# Altium PCB PCB2.PcbDoc
Units mil, origin at the board's own origin, x right, y up, seen from the top; angles counter-clockwise.
Board outline 5545 x 5530 mil, 2 copper layers (Top Layer, Bottom Layer); 7 components, 0 nets, 14 pads, 0 vias.
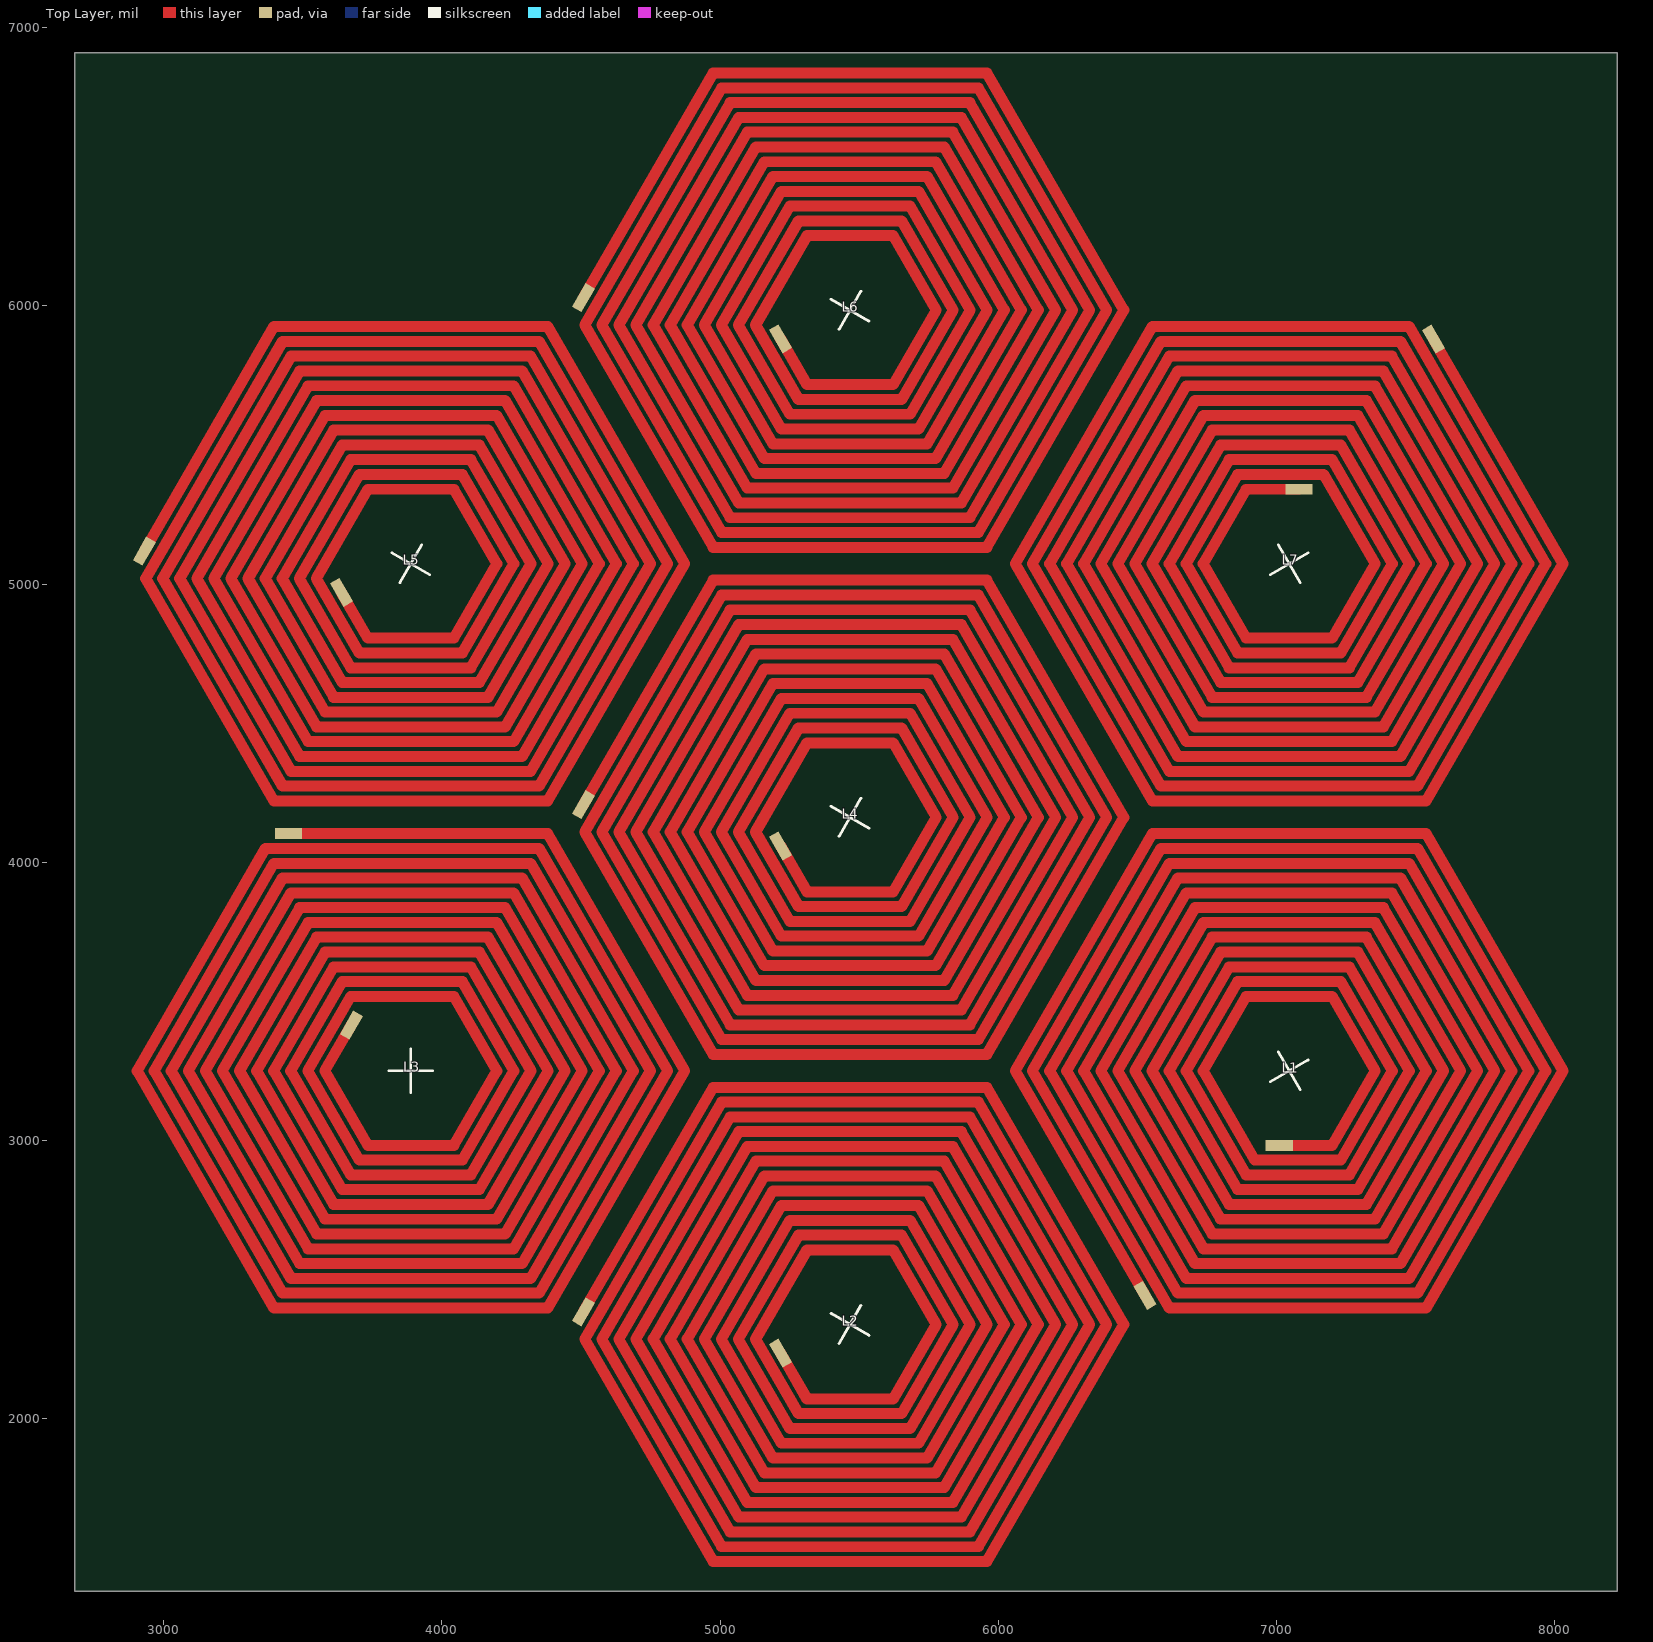
[diagram p0: Top Layer view]
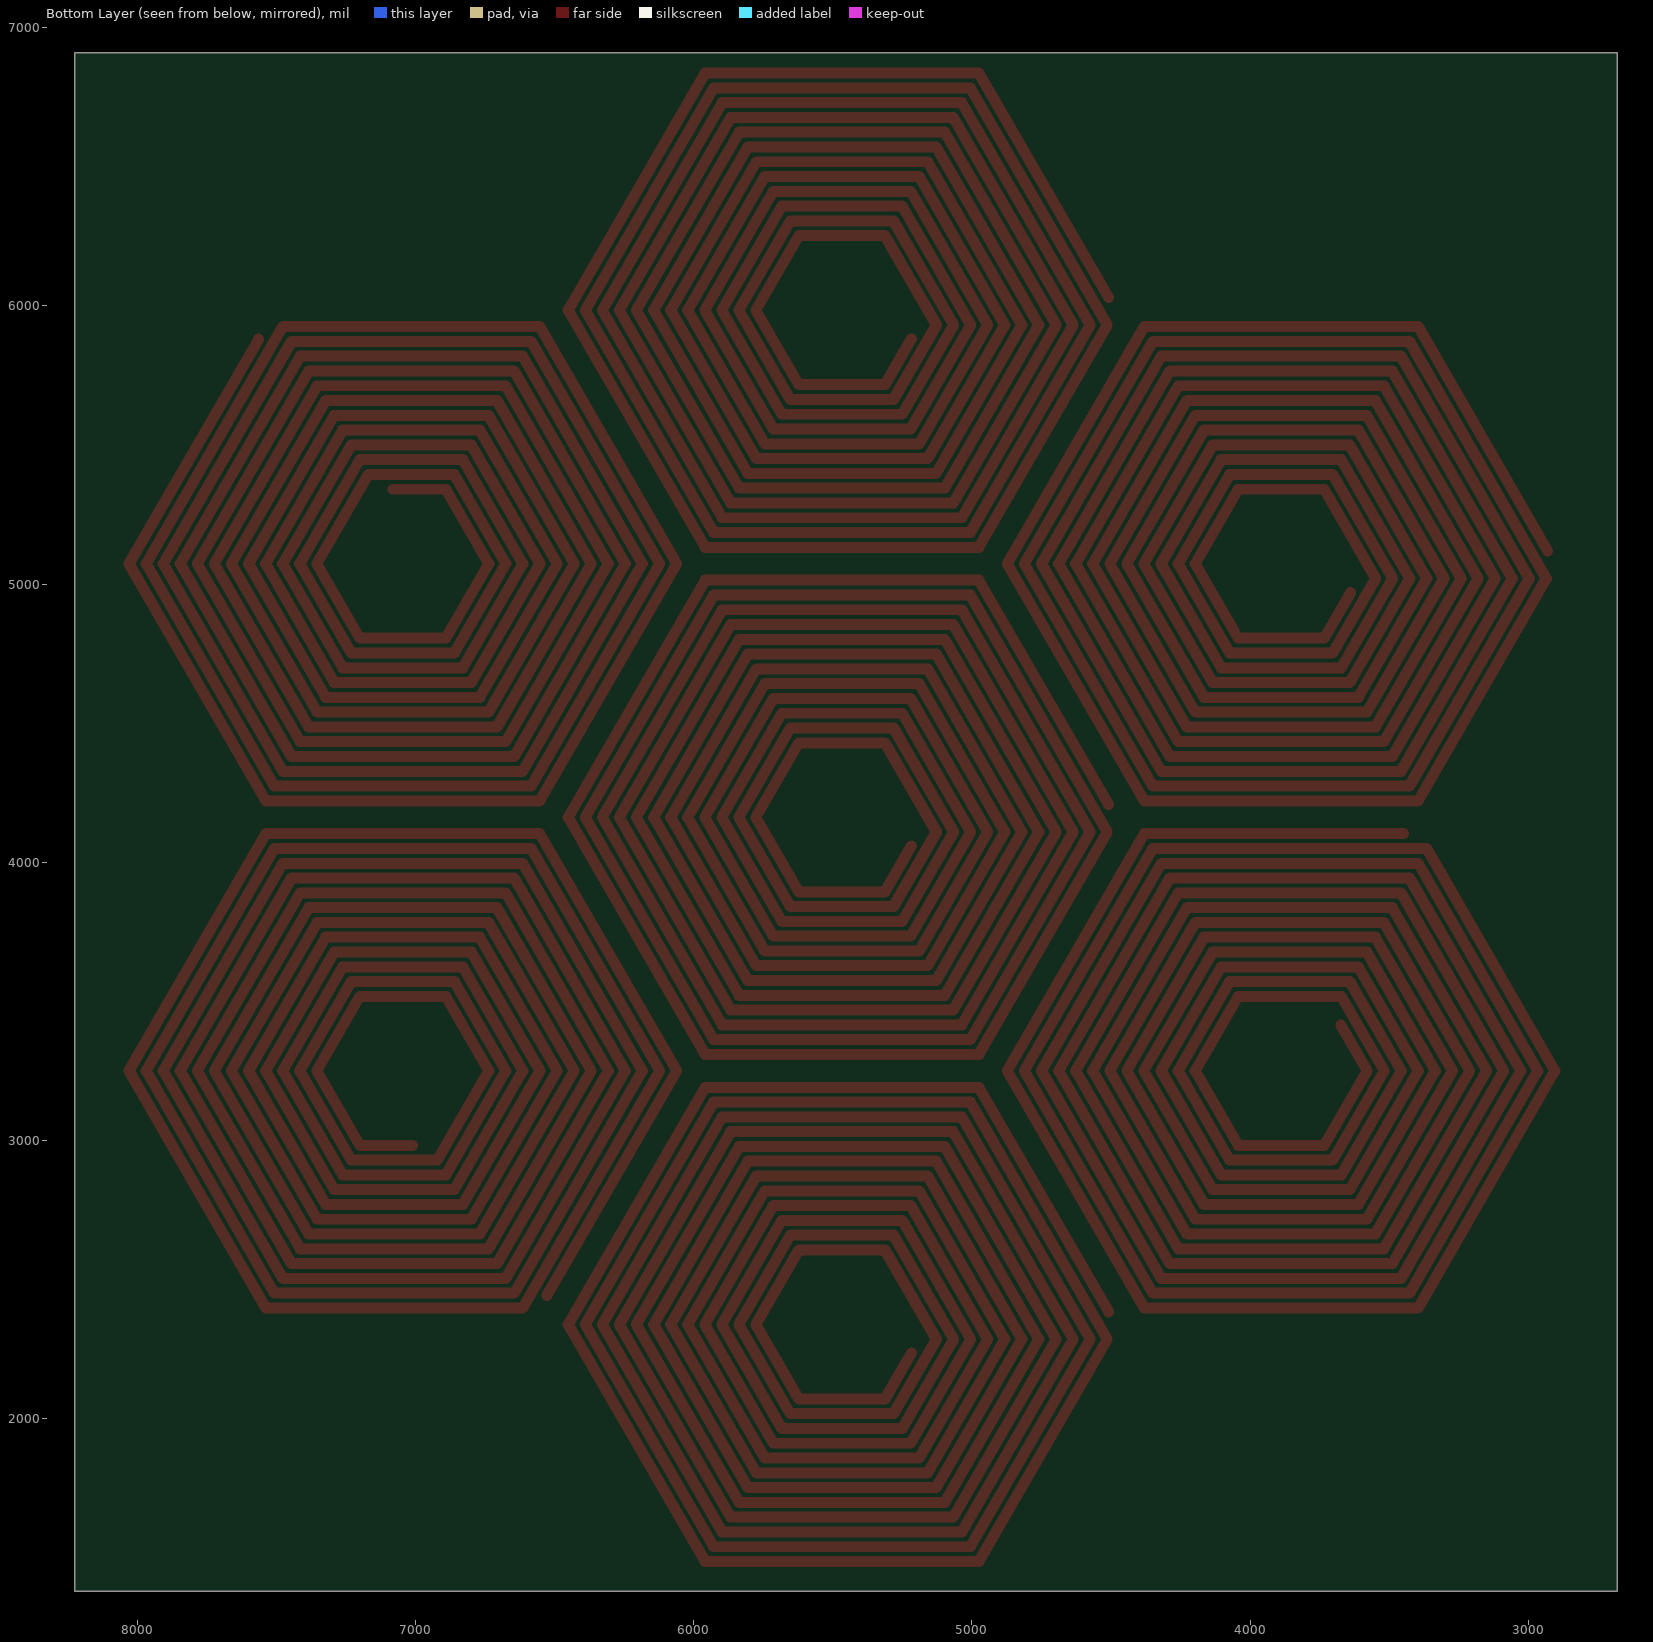
[diagram p1: Bottom Layer view, seen from below]

## Layer stack, top to bottom
Top Solder: solder mask 0.4, Solder Resist, Dk 3.5
Top Layer: signal copper 1.4
Dielectric 1: dielectric 12.6, FR-4, Dk 4.8
Bottom Layer: signal copper 1.4
Bottom Solder: solder mask 0.4, Solder Resist, Dk 3.5

## Board outline
2680,1380 8225,1380 8225,6910 2680,6910

## Design rules (kind name [scope] priority, off if disabled: settings)
Clearance [All] p1: gap=10 ignorepadtopadclearanceinfootprint=FALSE except(0: Arc-Hole Track-Hole SMDPad-Hole THPad-Hole Via-Hole Fill-Hole Poly-Hole Region-Hole Text-Hole)
PolygonConnect [All] p1: connectstyle=Relief reliefconductorwidth=10 reliefentries=4 polygonreliefangle="90 Angle" airgapwidth=10
RoutingVias [All] p1: holewidth=28 width=50 viastyle="Through Hole" minholewidth=28 minwidth=50 maxholewidth=28 maxwidth=50
SolderMaskExpansion [All] p1: expansion=4 istentingtop=FALSE
Width [All] p1: maxlimit=10 minlimit=10 preferedwidth=10
30 further rules are at their usual default settings.

## Components (designator, comment, footprint, x,y, rotation, side; value= is the part's Value field where it differs from the comment)
L1 "Inductor" HEXAGON_50-15 7045.63,3250.2 r120 top net-tie value=8uH
L2 "Inductor" HEXAGON_50-15 5466.97,2338.74 r60 top net-tie value=8uH
L3 "Inductor" HEXAGON_50-15 3888.31,3250.2 r0 top net-tie value=8uH
L4 "Inductor" HEXAGON_50-15 5466.97,4161.61 r60 top net-tie value=8uH
L5 "Inductor" HEXAGON_50-15 3888.31,5073.03 r60 top net-tie value=8uH
L6 "Inductor" HEXAGON_50-15 5466.97,5984.49 r60 top net-tie value=8uH
L7 "Inductor" HEXAGON_50-15 7045.63,5073.03 r300 top net-tie value=8uH

## Footprints (in the part's own frame and the unit in brackets; to place one, negate y for a bottom-side part, rotate by r counter-clockwise, add the part's x,y. Pads: shape width x height; smd on the part's side, far side on the other; paste and mask are expansions set on the pad)
HEXAGON_50-15 [mm]
  rect 2.5x1 smd mask+0.102: 1(-11.176,21.651)
  rect 2.5x1 smd rot 60 mask+0.102: 2(-5.44,4.179)
  Top Layer lines w1: -11.176,21.651 12.5,21.651 25,0 12.5,-21.651 -12.5,-21.651 -25,0 -13.279,20.301 11.721,20.301 23.441,0 11.721,-20.301 -11.721,-20.301 -23.441,0 -12.5,18.951 10.941,18.951 21.882,0 10.941,-18.951 -10.941,-18.951 -21.882,0 -11.721,17.601 10.162,17.601 20.323,0 10.162,-17.601 -10.162,-17.601 -20.323,0 -10.941,16.251 9.382,16.251 18.765,0 9.382,-16.251 -9.382,-16.251 -18.765,0 -10.162,14.901 8.603,14.901 17.206,0 8.603,-14.901 -8.603,-14.901 -17.206,0 -9.382,13.551 7.823,13.551 15.647,0 7.823,-13.551 -7.823,-13.551 -15.647,0 -8.603,12.201 7.044,12.201 14.088,0 7.044,-12.201 -7.044,-12.201 -14.088,0 -7.823,10.851 6.265,10.851 12.529,0 6.265,-10.851 -6.265,-10.851 -12.529,0 -7.044,9.501 5.485,9.501 10.97,0 5.485,-9.501 -5.485,-9.501 -10.97,0 -6.265,8.151 4.706,8.151 9.412,0 4.706,-8.151 -4.706,-8.151 -9.412,0 -5.485,6.801 3.926,6.801 7.853,0 3.926,-6.801 -3.926,-6.801 -7.853,0 -5.44,4.179
  silkscreen extent -2,-2 2,2

## Part data
L1 L2 L3 L4 L5 L6 L7: Code_IEC=1005, Code_JEITA=0402, LatestRevisionDate=29-May-2009, LatestRevisionNote="IPC-7351 Footprint Added.", PackageDescription="Chip Inductor", PackageReference=0402-A, Published=8-Jun-2000, Publisher="Altium Limited"

## Nets (pads, with @x,y where several pads share a name; then routed paths per layer and width w, separated by ;. In a path a pad name is that pad's centre, name@x,y a point inside that pad or via, vN(x,y) a via of type N, cw(c..) or ccw(c..) an arc to the next point about the centre after c; other vN are vias at no path point)
pads on no net: L1.1 L1.2 L2.1 L2.2 L3.1 L3.2 L4.1 L4.2 L5.1 L5.2 L6.1 L6.2 L7.1 L7.2